# Altium PCB slave.PcbDoc (part 2 of 8)
Units mm, origin at the board's own origin, x right, y up, seen from the top; angles counter-clockwise.
Board outline 160 x 100 mm, 6 copper layers (Top, FUSED_VBAT-, Signals1, Signals2, SUPPLY, Bottom), stack 1.67 mm thick; 582 components, 375 nets, 1615 pads, 3043 vias.
Unrouted connection lines stored in the file: 1.
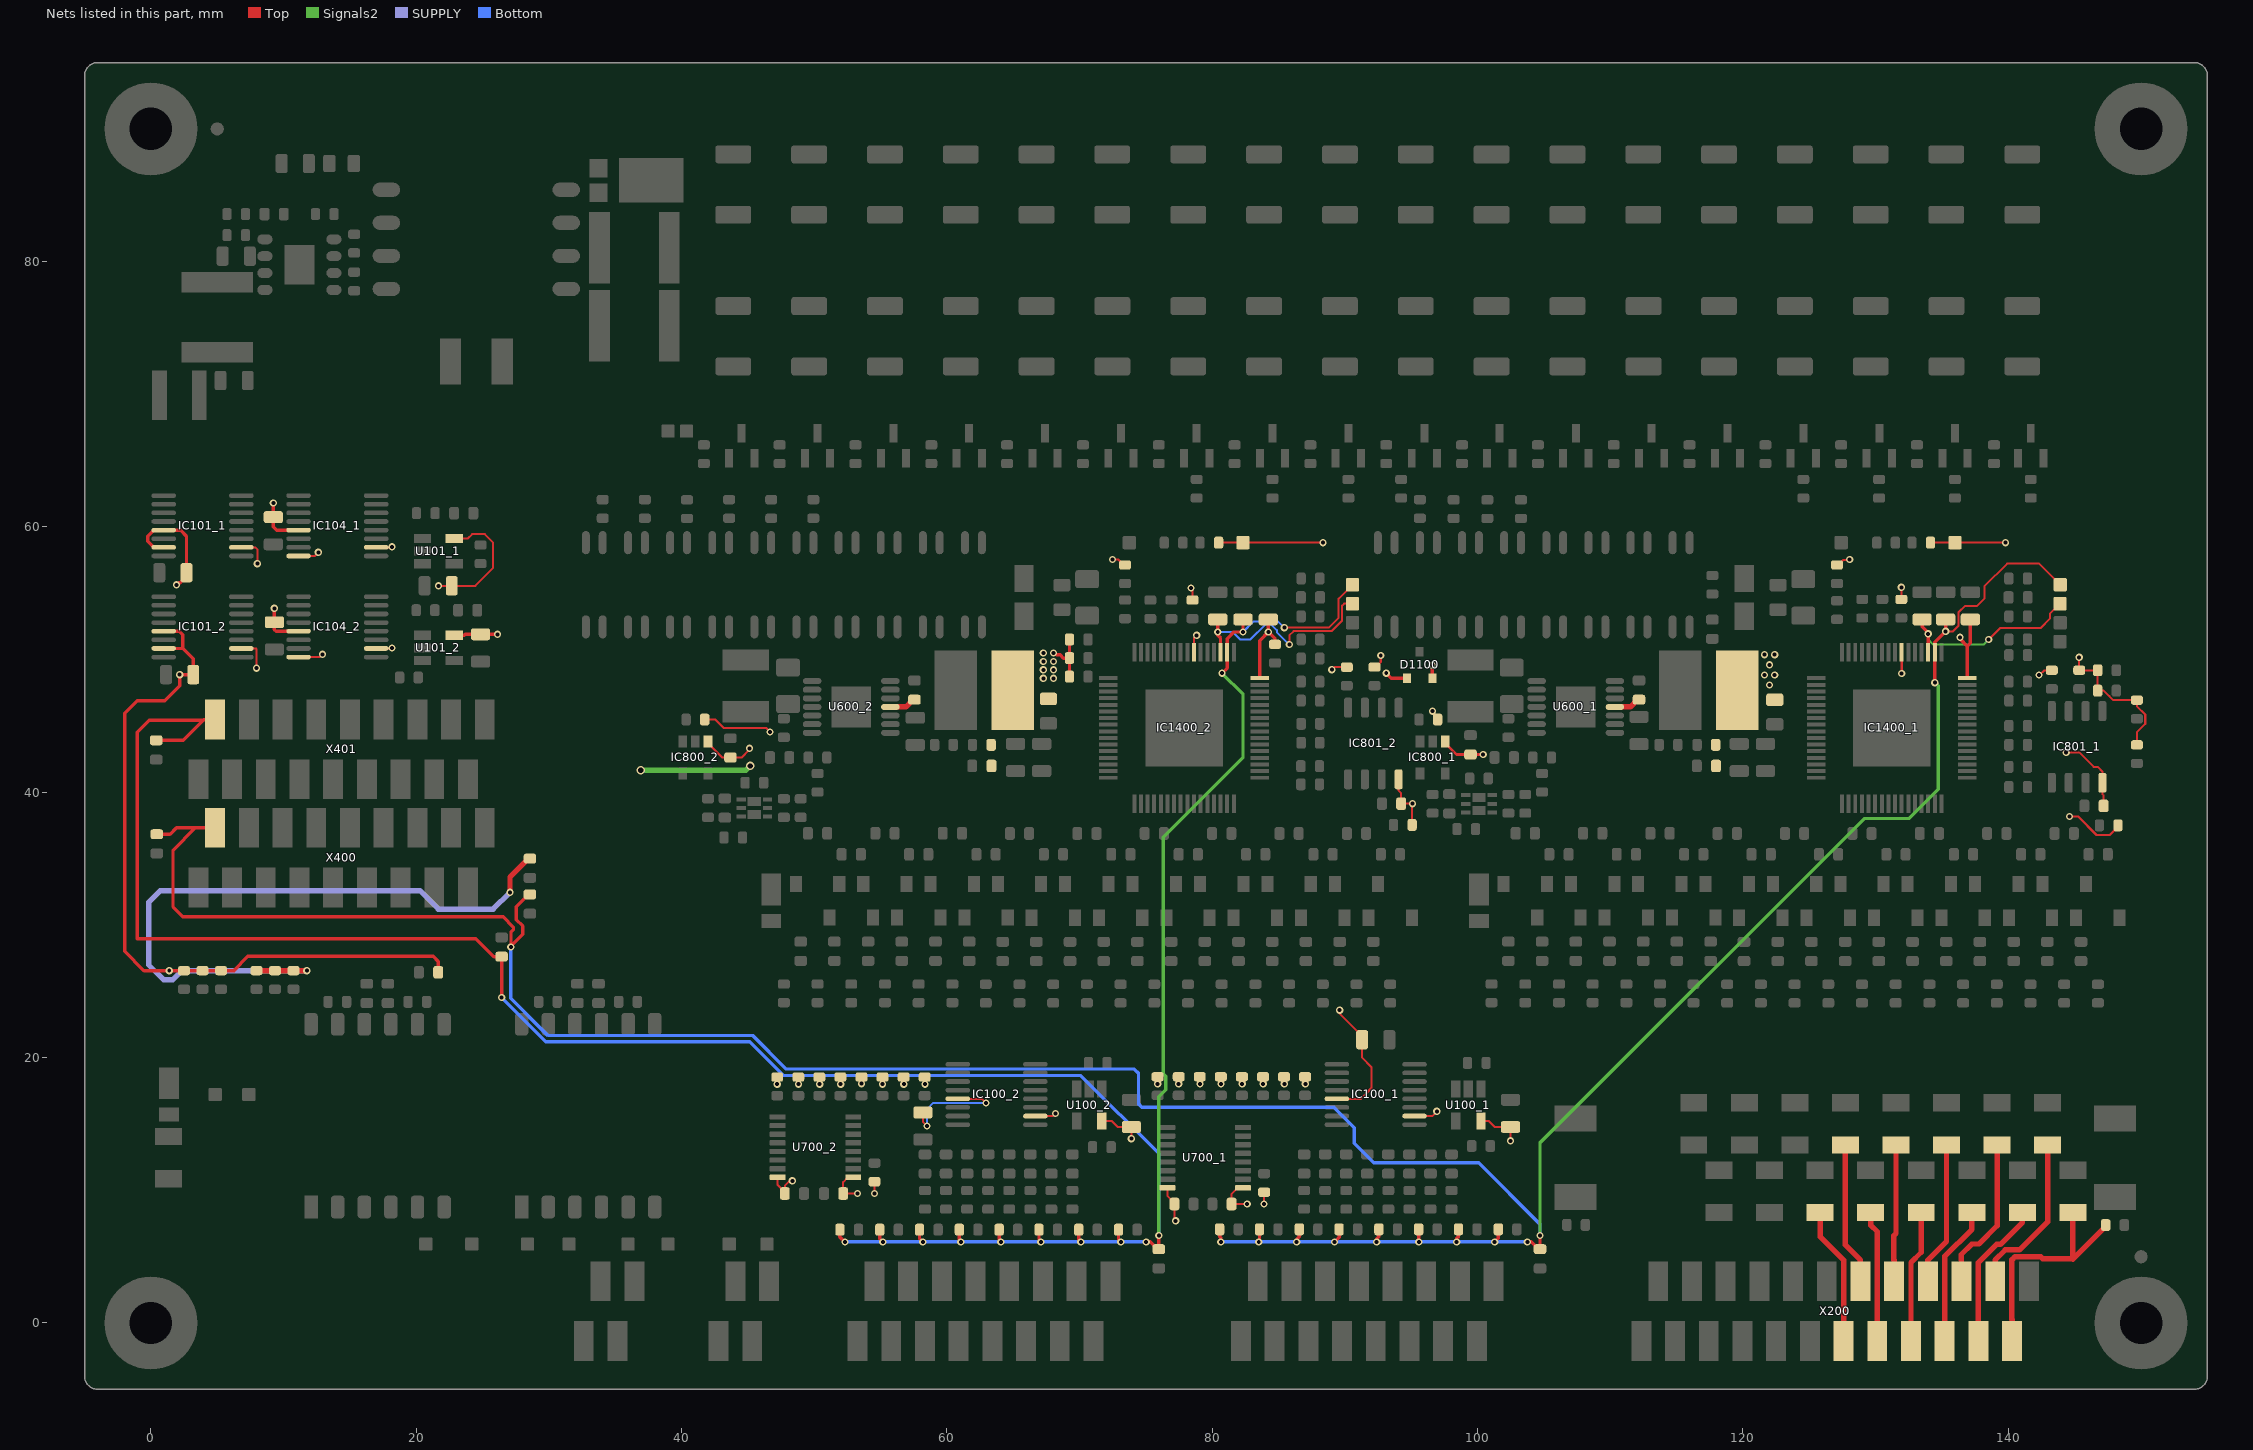
[diagram p6: the nets of this part, all layers, seen from the top]

## Components (designator, comment, footprint, x,y, rotation, side; value= is the part's Value field where it differs from the comment) (continued)
Z1315_1 "MMSZ4692T1G" ONSC-SOD-123-2-425-04_V 111.211,30.552 r0 top locked (schematic designator Z1315)
Z1315_2 "MMSZ4692T1G" ONSC-SOD-123-2-425-04_V 57.871,30.552 r0 top locked (schematic designator Z1315)
Z1316_1 "MMSZ4692T1G" ONSC-SOD-123-2-425-04_V 113.731,33.092 r0 top locked (schematic designator Z1316)
Z1316_2 "MMSZ4692T1G" ONSC-SOD-123-2-425-04_V 60.411,33.092 r0 top locked (schematic designator Z1316)
Z1317_1 "MMSZ4692T1G" ONSC-SOD-123-2-425-04_V 116.291,30.552 r0 top locked (schematic designator Z1317)
Z1317_2 "MMSZ4692T1G" ONSC-SOD-123-2-425-04_V 62.951,30.552 r0 top locked (schematic designator Z1317)

## Footprints (in the part's own frame and the unit in brackets; to place one, negate y for a bottom-side part, rotate by r counter-clockwise, add the part's x,y. Pads: shape width x height; smd on the part's side, far side on the other; paste and mask are expansions set on the pad)
690357280476 [mm] "MiniModule Connectors, PCB Type, Male, SMT, Vertical, 4p"
  rect 1.5x3 smd: 1(1.905,2.25) 2(0.635,-2.25) 3(-0.635,2.25) 4(-1.905,-2.25)
  silkscreen extent -3.7,-2.6 3.7,2.6, body extent -4.05,-3.25 4.06,3.25, height 5.16
690357281676 [mm] "MiniModule Connectors, PCB Type, Male, SMT, Vertical, 16p"
  rect 1.5x3 smd: 1(9.525,2.25) 2(8.255,-2.25) 3(6.985,2.25) 4(5.715,-2.25) 5(4.445,2.25) 6(3.175,-2.25) 7(1.905,2.25) 8(0.635,-2.25) 9(-0.635,2.25) 10(-1.905,-2.25) 11(-3.175,2.25) 12(-4.445,-2.25) 13(-5.715,2.25) 14(-6.985,-2.25) 15(-8.255,2.25) 16(-9.525,-2.25)
  silkscreen extent -11.32,-2.6 11.32,2.6, body extent -11.67,-3.25 11.68,3.25, height 5.16
690357281876 [mm] "MiniModule Connectors, PCB Type, Male, SMT, Vertical, 18p"
  rect 1.5x3 smd: 1(10.795,2.25) 2(9.525,-2.25) 3(8.255,2.25) 4(6.985,-2.25) 5(5.715,2.25) 6(4.445,-2.25) 7(3.175,2.25) 8(1.905,-2.25) 9(0.635,2.25) 10(-0.635,-2.25) 11(-1.905,2.25) 12(-3.175,-2.25) 13(-4.445,2.25) 14(-5.715,-2.25) 15(-6.985,2.25) 16(-8.255,-2.25) 17(-9.525,2.25) 18(-10.795,-2.25)
  silkscreen extent -12.59,-2.6 12.59,2.6, body extent -12.94,-3.25 12.95,3.25, height 5.16
690357282476 [mm] "MiniModule Connectors, PCB Type, Male, SMT, Vertical, 24p"
  rect 1.5x3 smd: 1(14.605,2.25) 2(13.335,-2.25) 3(12.065,2.25) 4(10.795,-2.25) 5(9.525,2.25) 6(8.255,-2.25) 7(6.985,2.25) 8(5.715,-2.25) 9(4.445,2.25) 10(3.175,-2.25) 11(1.905,2.25) 12(0.635,-2.25) 13(-0.635,2.25) 14(-1.905,-2.25) 15(-3.175,2.25) 16(-4.445,-2.25) 17(-5.715,2.25) 18(-6.985,-2.25) 19(-8.255,2.25) 20(-9.525,-2.25) 21(-10.795,2.25) 22(-12.065,-2.25) 23(-13.335,2.25) 24(-14.605,-2.25)
  silkscreen extent -16.4,-2.6 16.4,2.6, body extent -16.75,-3.25 16.76,3.25, height 5.16
ADI-RJ-5_M [mm] "SOT-23, 5-Leads, Body 2.9x1.6mm, Pitch 0.95mm, IPC Low Density"
  rect 1.3x0.7 smd: 1(-1.2,0.95) 2(-1.2,0) 3(-1.2,-0.95) 4(1.2,-0.95) 5(1.2,0.95)
  silkscreen extent -1.32,-1.5 0.15,1.98, body extent -0.85,-1.5 0.85,1.5, height 1.45
ADI-RU-16_M [mm] "SOP, 16-Leads, Body 5x4.4mm, Pitch 0.65mm, IPC Low Density"
  oval 1.85x0.35 smd: 1(-2.925,2.275) 2(-2.925,1.625) 3(-2.925,0.975) 4(-2.925,0.325) 5(-2.925,-0.325) 6(-2.925,-0.975) 7(-2.925,-1.625) 8(-2.925,-2.275) 9(2.925,-2.275) 10(2.925,-1.625) 11(2.925,-0.975) 12(2.925,-0.325) 13(2.925,0.325) 14(2.925,0.975) 15(2.925,1.625) 16(2.925,2.275)
  silkscreen extent -3.05,-2.55 1.6,3.12, body extent -2.25,-2.55 2.25,2.55, height 1.2
CAPC1608X08N [mm] "Chip Capacitor, 2-Leads, Body 1,60x0,80mm, IPC Medium Density"
  rrect50% 0.75x0.95 smd: 1(-0.725,0) 2(0.725,0)
  body extent -0.85,-0.45 0.85,0.45, height 0.8
CAPC2012X14N [mm] "Chip Capacitor, 2-Leads, Body 2,00x1,25mm, IPC Medium Density"
  rrect40% 0.9x1.45 smd: 1(-1.025,0) 2(1.025,0)
  silkscreen extent -0.2,-0.63 0.2,0.63, body extent -1.1,-0.72 1.1,0.72, height 1.45
CAPC2220(5750)230_N [mm] "Chip Capacitor, Body 5.7x5.0mm, Height 2.3mm, IPC Medium Density"
  rect 1.55x5.4 smd: 1(-2.625,0) 2(2.625,0)
  silkscreen extent -1.45,-2.6 1.45,2.6, body extent -3.05,-2.7 3.05,2.7, height 2.3
CAPC3216X18N [mm] "Chip Capacitor, 2-Leads, Body 3,20x1,60mm, IPC Medium Density"
  rrect30% 1.35x1.8 smd: 1(-1.375,0) 2(1.375,0)
  silkscreen extent -0.3,-0.8 0.3,0.8, body extent -1.7,-0.9 1.7,0.9, height 1.8
CAPC4532X16N [mm] "Chip Capacitor, 2-Leads, Body 4,50x3,20mm, IPC Medium Density"
  rect 1.6x3.5 smd: 1(-1.95,0) 2(1.95,0)
  silkscreen extent -0.75,-1.65 0.75,1.65, body extent -2.4,-1.75 2.4,1.75, height 1.55
DIOD-POWERDI123-2_V [mm] "SOD, 2-Leads, Body 2.8x1.78mm"
  rect 1.05x1.5 smd: 1(-1.525,0)
  rect 2.4x1.5 smd: 2(0.85,0)
  silkscreen extent 2.55,-0.89 2.55,0.89, body extent -1.4,-0.89 1.4,0.89, height 1.01
Fiducial_2 [mm] "Fiducial Round 1mm"
  round 1 smd paste-0.5 mask+0.5: 0(0,0)
  Top keep-out circle w0.2: c0,0 r0.9
HM2102NL [mil]
  rect 67.5x40 smd: 1(-271.65,196.85)
  rrect50% 67.5x40 smd: 2(-271.65,117.85) 3(-271.65,38.85) 4(-271.65,-40.15) 5(-271.65,-119.15) 6(-271.65,-198.15) 7(270.85,-198.15) 8(270.85,-119.15) 9(270.85,-40.15) 10(270.85,38.85) 11(270.85,117.85) 12(270.85,196.85)
  silkscreen extent -224,-300 224,300, body extent -224,-299 224,299, height 197
Hole_3.2_Iso [mm]
  round 7 hole 3.2: Hole_3.2(0,0)
LEDC1608X07N [mm] "LED, 2-Leads, Body 1,60x0,80mm, IPC Medium Density"
  rrect50% 0.7x0.9 smd: 1(-0.7,0) 2(0.7,0)
  silkscreen extent -1.35,0.35 -1.25,0.45, body extent -0.8,-0.4 0.8,0.4, height 0.7
LITTLEFUSE_448 [mm] "Littlefuse 448 Series, 2-Leads, Body 6,10x2,69mm, IPC Medium Density"
  rect 1.96x3.15 smd: 1(-2.95,0) 2(2.95,0)
  silkscreen extent -1.1,-1.47 1.1,1.48, body extent -3.15,-1.47 3.15,1.47, height 2.94
LITTLEFUSE_466 [mm] "Littlefuse 466 Series, 2-Leads, Body 3,18x1,52mm"
  rect 1.3x2.03 smd: 1(-1.59,0) 2(1.59,0)
  silkscreen extent -0.55,-0.92 0.55,0.91, body extent -1.65,-0.82 1.65,0.82, height 0.66
LT-S8E-8_V [mm] "SOIC, 8-Leads, Body 4.9x3.9mm, Pitch 1.27mm, Thermal Pad 3.25x2.26mm, Recommended"
  oval 1.143x0.76 smd: 1(-2.602,1.905) 2(-2.602,0.635) 3(-2.602,-0.635) 4(-2.602,-1.905) 5(2.601,-1.905) 6(2.601,-0.635) 7(2.601,0.635) 8(2.601,1.905)
  rect 2.26x2.99 smd: 9(0,0)
  silkscreen extent -2.73,-2.5 1.62,2.96, body extent -3.01,-2.45 3.01,2.45, height 1.75
NXP-SOT23-3_V [mm] "SOT23, 3-Leads, Body 1.3x2.9mm, Pitch 0.95mm"
  rect 0.6x0.7 smd paste-0.05: 1(0.95,1) 2(-0.95,1) 3(0,-1)
  silkscreen extent -1.45,-0.65 1.45,1.79, body extent -1.45,-0.65 1.45,0.65, height 1.1
NXP-SOT23_N [mm] "SOT23, 3-Leads, Body 3x1.4mm, Pitch 0.95mm, IPC Medium Density"
  rect 1.4x0.6 smd: 1(-0.95,0.95) 2(-0.95,-0.95) 3(0.95,0)
  silkscreen extent -1.07,-1.5 0.7,1.92, body extent -0.7,-1.5 0.7,1.5, height 1.1
ONSC-SOD-123-2-425-04_V [mm] "SOD, 2-Leads, Body 2.69x1.6mm"
  rect 0.91x1.22 smd: 1(-1.635,0) 2(1.635,0)
  silkscreen extent -1.76,-0.8 0.78,1.28, body extent -1.35,-0.8 1.35,0.8, height 1.35
PBSS4112PANP [mm]
  rect 0.7x0.3 smd: 1(-0.995,0.65) 2(-0.995,0) 3(-0.995,-0.65) 4(0.995,-0.65) 5(0.995,0) 6(0.995,0.65)
  rect 1x0.67 smd: 7(0,0.49) 8(0,-0.49)
  silkscreen extent -1.5,-1.2 1.05,1.25, body extent -1.05,-1.05 1.05,1.05, height 0.65
PowerDI5 [mm] "PowerDI5, 3-Leads, Body 3,97x6,50mm"
  rect 4.86x3.36 smd: 1(1.126,0)
  rect 1.39x1.4 smd: 2(-2.856,0.92) 3(-2.856,-0.92)
  silkscreen extent -1.88,-2.05 3.63,2.32, body extent -3.25,-2.02 3.25,2.02, height 1.15
PW0016A_L [mm] "SOP, 16-Leads, Body 5.1x4.5mm, Pitch 0.65mm, IPC High Density"
  rrect25% 1.2x0.4 smd: 1(-2.85,2.275) 2(-2.85,1.625) 3(-2.85,0.975) 4(-2.85,0.325) 5(-2.85,-0.325) 6(-2.85,-0.975) 7(-2.85,-1.625) 8(-2.85,-2.275) 9(2.85,-2.275) 10(2.85,-1.625) 11(2.85,-0.975) 12(2.85,-0.325) 13(2.85,0.325) 14(2.85,0.975) 15(2.85,1.625) 16(2.85,2.275)
  silkscreen extent -2.98,-2.55 1.85,3.15, body extent -3.21,-2.5 3.21,2.5, height 1
PWP0014A [mm] "TI PWP0014A Package"
  oval 1.4x0.45 smd: 1(-2.95,1.95) 2(-2.95,1.3) 3(-2.95,0.65) 4(-2.95,0) 5(-2.95,-0.65) 6(-2.95,-1.3) 7(-2.95,-1.95) 8(2.95,-1.95) 9(2.95,-1.3) 10(2.95,-0.65) 11(2.95,0) 12(2.95,0.65) 13(2.95,1.3) 14(2.95,1.95)
  rect 3x3.1 smd: 15(0,0)
  silkscreen extent -3.07,-2.55 1.85,2.85, body extent -3.2,-2.55 3.2,2.55, height 1.2
RESC1608X05N [mm] "Chip Resistor, 2-Leads, Body 1,60x0,80mm, IPC Medium Density"
  rrect50% 0.7x0.9 smd: 1(-0.7,0) 2(0.7,0)
  body extent -0.85,-0.45 0.85,0.45, height 0.45
RESC2012X05N [mm] "Chip Resistor, 2-Leads, Body 2,00x1,20mm, IPC Medium Density"
  rrect40% 0.95x1.3 smd: 1(-0.925,0) 2(0.925,0)
  silkscreen extent -0.05,-0.55 0.05,0.55, body extent -1.05,-0.65 1.05,0.65, height 0.5
RESC5025X07N [mm] "Chip Resistor, 2-Leads, Body 5,00x2,50mm, IPC Medium Density"
  rrect30% 1.35x2.7 smd: 1(-2.275,0) 2(2.275,0)
  silkscreen extent -1.2,-1.25 1.2,1.25, body extent -2.6,-1.35 2.6,1.35, height 0.7
SOIC127P600X175-8N [mm] "SOIC, 8-Leads, Body 4,90x3,90mm, Pitch 1,27mm, IPC Medium Density"
  rrect50% 1.5x0.6 smd: 1(-2.7,1.905) 2(-2.7,0.635) 3(-2.7,-0.635) 4(-2.7,-1.905) 5(2.7,-1.905) 6(2.7,-0.635) 7(2.7,0.635) 8(2.7,1.905)
  silkscreen extent -2.8,-2.45 1.55,2.8, body extent -3,-2.45 3,2.45, height 1.75
SOIC127P700X220-4N [mm] "SOIC, 4-Leads, Body 2,60x4,40mm, Pitch 1,27mm, IPC Medium Density"
  oval 1.75x0.6 smd: 1(-3.175,0.635) 2(-3.175,-0.635) 3(3.175,-0.635) 4(3.175,0.635)
  silkscreen extent -3.3,-1.45 1.9,1.61, body extent -3.5,-1.45 3.5,1.45, height 2.2
SOT-23-OT5_L [mm] "SOT23, 5-Leads, Body 2.9x1.7mm, Pitch 0.95mm, Lead Span 2.8mm, IPC High Density"
  rect 0.9x0.65 smd: 1(-1.2,0.95) 2(-1.2,0) 3(-1.2,-0.95) 4(1.2,-0.95) 5(1.2,0.95)
  silkscreen extent -1.32,-1.55 0.35,1.95, body extent -0.9,-1.55 0.9,1.55, height 1.45
Testpoint_S1 [mm] "Testpunkt, quardratisch 1mm"
  rrect20% 1x1 smd paste-0.5: 1(0,0)
TSQFP50P1200X1200X160_HS-65N [mm] "TSQFP, 64-Leads, Body 10,00x10,00mm, Pitch 0,50mm, Thermal Pad 5,84x5,84mm, IPC Medium Density"
  rect 1.4x0.3 smd: 1(-5.7,3.75) 2(-5.7,3.25) 3(-5.7,2.75) 4(-5.7,2.25) 5(-5.7,1.75) 6(-5.7,1.25) 7(-5.7,0.75) 8(-5.7,0.25) 9(-5.7,-0.25) 10(-5.7,-0.75) 11(-5.7,-1.25) 12(-5.7,-1.75) 13(-5.7,-2.25) 14(-5.7,-2.75) 15(-5.7,-3.25) 16(-5.7,-3.75) 33(5.7,-3.75) 34(5.7,-3.25) 35(5.7,-2.75) 36(5.7,-2.25) 37(5.7,-1.75) 38(5.7,-1.25) 39(5.7,-0.75) 40(5.7,-0.25) 41(5.7,0.25) 42(5.7,0.75) 43(5.7,1.25) 44(5.7,1.75) 45(5.7,2.25) 46(5.7,2.75) 47(5.7,3.25) 48(5.7,3.75)
  rect 0.3x1.4 smd: 17(-3.75,-5.7) 18(-3.25,-5.7) 19(-2.75,-5.7) 20(-2.25,-5.7) 21(-1.75,-5.7) 22(-1.25,-5.7) 23(-0.75,-5.7) 24(-0.25,-5.7) 25(0.25,-5.7) 26(0.75,-5.7) 27(1.25,-5.7) 28(1.75,-5.7) 29(2.25,-5.7) 30(2.75,-5.7) 31(3.25,-5.7) 32(3.75,-5.7) 49(3.75,5.7) 50(3.25,5.7) 51(2.75,5.7) 52(2.25,5.7) 53(1.75,5.7) 54(1.25,5.7) 55(0.75,5.7) 56(0.25,5.7) 57(-0.25,5.7) 58(-0.75,5.7) 59(-1.25,5.7) 60(-1.75,5.7) 61(-2.25,5.7) 62(-2.75,5.7) 63(-3.25,5.7) 64(-3.75,5.7)
  rect 5.84x5.84 smd: 65(0,0)
  silkscreen extent -5.82,-4.6 4.6,4.6, body extent -6,-6 6,6, height 1.6
TYS6045221M-10 [mm] "Precision Wire Wound Inductor, 2-Leads, Body 6,00x6,00mm, IPC Medium Density"
  rect 3.2x6 smd: 1(-2.15,0) 2(2.15,0)
  silkscreen extent -4.05,-3.15 0.15,3.15, body extent -3.1,-3 3.1,3, height 4.8
VISH-DO-214AC-2_L [mm] "DO-214AC, 2-Leads, Body 4.5x2.79mm, IPC High Density"
  rect 2.05x1.45 smd: 1(-1.425,0) 2(1.425,0)
  silkscreen extent -3.12,-1.4 2.25,1.4, body extent -2.25,-1.4 2.25,1.4, height 2.29
"WE-LQS 4018" [mm] "SMD Power Inductor, 2-Leads, Body 4.0x4.0mm"
  rect 1.1x3.7 smd: 1(-1.5,0) 2(1.5,0)
  body extent -2,-2 2,2, height 1.78
WE_750313457 [mm] "Würth Elektronik 750313457"
  oval 2.08x1.07 smd: 1(-6.78,-3.735) 2(-6.78,-1.245) 3(-6.78,1.245) 4(-6.78,3.735) 5(6.78,3.735) 6(6.78,1.245) 7(6.78,-1.245) 8(6.78,-3.735)
  silkscreen extent -6.98,-6.65 5.43,6.65, body extent -7.62,-6.65 7.62,6.65, height 11.44

## Part data
C100_1 C100_2 C400 C401 C404 C405 C406 C407 C602_1 C602_2 C604_1 C604_2 C607_1 C607_2 C700_1 C700_2 C701_1 C701_2 C800_1 C800_2 C801_1 C801_2 C903 C1100: library part gen_C_ceramic_100n_50V_X7R_0603, "MLCC", Capacitance=100n, Case EIA=0603, Case Metric=1608, Dielectric=X7R, PnP Package=C_0603_10, PnP Value=100n/50V/X7R, Rated Voltage=50V, Supplier Part Number 1=2525267, Automotive Qualified=True, Part Number=gen_C_ceramic_100n_50V_X7R_0603, PnP equipped=x, Supplier 1=Farnell, Supplier 2=Digikey, Supplier 3=Farnell, Supplier Part Number 2=490-6049-1-ND, Supplier Part Number 3=2070398
C101_1 C101_2 C102_1 C102_2 C103_1 C103_2 C104_1 C104_2 C105_1 C105_2 C603_1 C603_2 C900 C904 C1401_1 C1401_2 C1402_1 C1402_2 C1403_1 C1403_2: library part gen_C_ceramic_1u_50V_X7R_0805, "MLCC", Capacitance=1u, Case EIA=0805, Case Metric=2012, Dielectric=X7R, Operating Temperature="-55°C - +125°C", Rated Voltage=50V, Supplier Part Number 1=2672199, Tolerance="± 10%", Automotive Qualified=True, AVT Set=x, Part Number=gen_C_ceramic_1u_50V_X7R_0805, Supplier 1=Farnell, Supplier 2=Farnell, Supplier 3=Farnell, Supplier Part Number 2=2479894, Supplier Part Number 3=2464630
C106_1 C106_2 C107_1 C107_2 C108_1 C108_2 C109_1 C109_2 C110_1 C110_2 C111_1 C111_2 C112_1 C112_2 C113_1 C113_2 C114_1 C114_2 C115_1 C115_2 C608_1 C608_2 C1300_1 C1300_2 C1301_1 C1301_2 C1302_1 C1302_2 C1303_1 C1303_2 C1304_1 C1304_2 C1305_1 C1305_2 C1306_1 C1306_2 C1307_1 C1307_2 C1308_1 C1308_2 C1309_1 C1309_2 C1310_1 C1310_2 C1311_1 C1311_2 C1312_1 C1312_2 C1313_1 C1313_2 C1314_1 C1314_2 C1315_1 C1315_2 C1316_1 C1316_2 C1317_1 C1317_2 C1318_1 C1318_2 C1319_1 C1319_2 C1320_1 C1320_2 C1321_1 C1321_2 C1322_1 C1322_2 C1323_1 C1323_2 C1324_1 C1324_2 C1325_1 C1325_2 C1326_1 C1326_2 C1327_1 C1327_2 C1328_1 C1328_2 C1329_1 C1329_2 C1330_1 C1330_2 C1331_1 C1331_2 C1332_1 C1332_2 C1333_1 C1333_2 C1334_1 C1334_2 C1335_1 C1335_2: library part gen_C_ceramic_10n_100V_X7R_0603, "MLCC", Capacitance=10n, Case EIA=0603, Case Metric=1608, Dielectric=X7R, Rated Voltage=100V, Supplier Part Number 1=1301715, Automotive Qualified=True, Part Number=gen_C_ceramic_10n_100V_X7R_0603, Supplier 1=Farnell, Supplier 2=Farnell, Supplier 3=Farnell, Supplier Part Number 2=2821192, Supplier Part Number 3=2210878
C600_1 C600_2: library part gen_C_ceramic_1u_250V_X7R_1812, "MLCC", Capacitance=1u, Case EIA=1812, Case Metric=4532, Dielectric=X7T, Rated Voltage=250V, Supplier Part Number 1=2435499, Automotive Qualified=True, Part Number=gen_C_ceramic_1u_250V_X7R_1812, Supplier 1=Farnell
C601_1 C601_2 C1400_1 C1400_2: library part gen_C_ceramic_100n_200V_X7R_1206, "MLCC", Capacitance=100n, Case EIA=1206, Case Metric=3216, Dielectric=X7R, Rated Voltage=200V, Supplier Part Number 1=2673161, Automotive Qualified=True, Part Number=gen_C_ceramic_100n_200V_X7R_1206, Supplier 1=Farnell, Supplier 2=Farnell, Supplier Part Number 2=2520773
C605_1 C605_2 C606_1 C606_2: library part gen_C_ceramic_2u2_10V_X7R_0805, "MLCC", Capacitance=2u2, Case EIA=0805, Case Metric=2012, Dielectric=X7R, Rated Voltage=10V, Supplier Part Number 1=2478259, Automotive Qualified=True, Part Number=gen_C_ceramic_2u2_10V_X7R_0805, Supplier 1=Farnell, Supplier 2=Farnell, Supplier Part Number 2=2070513
C902: library part gen_C_ceramic_22u_50V_X7R_2220_stacked, "MLCC", Capacitance=22u, Case EIA=2220, Case Metric=5750, Dielectric=X7R, Rated Voltage=50V, Supplier Part Number 1=399-5797-1-ND, Automotive Qualified=True, Part Number=gen_C_ceramic_22u_50V_X7R_2220_stacked, Supplier 1=Digikey
C905: library part gen_C_ceramic_470p_100V_X7R_0805, "MLCC", Capacitance=470p, Case EIA=0805, Case Metric=2012, Dielectric=X7R, Rated Voltage=100V, Supplier Part Number 1=2070482, Automotive Qualified=True, Part Number=gen_C_ceramic_470p_100V_X7R_0805, Supplier 1=Farnell
C906: library part gen_C_ceramic_4n7_1000V_X7R_1812, "MLCC", Capacitance=4n7, Case EIA=1812, Case Metric=4532, Dielectric=X7R, Rated Voltage=1000V, Supplier Part Number 1=2834565, Automotive Qualified=True, Part Number=gen_C_ceramic_4n7_1000V_X7R_1812, Supplier 1=Farnell
C907 C908: library part gen_C_ceramic_2u2_250V_X7R_2220, "MLCC", Capacitance=2u2, Case EIA=2220, Case Metric=5750, Dielectric=X7R, Rated Voltage=250V, Supplier Part Number 1=445-7997-2-ND, Automotive Qualified=True, Part Number=gen_C_ceramic_2u2_250V_X7R_2220, Supplier 1=Digikey
C1404_1 C1404_2 C1405_1 C1405_2: library part gen_C_ceramic_100p_50V_C0G_0603, "MLCC", Capacitance=100p, Case EIA=0603, Case Metric=1608, Dielectric=C0G, Rated Voltage=50V, Supplier Part Number 1=2478236, Tolerance="± 10%", Automotive Qualified=True, Part Number=gen_C_ceramic_100p_50V_C0G_0603, Supplier 1=Farnell
D900 D1400_1 D1400_2: library part CMP-2000-05099-1, "1 A High Voltage Schottky Barrier Rectifier, 0.62 V, -55 to 175 degC, 2- Pin POWERDI123, Pb-Free, Tape and Reel", Average Rectified Current-Max=1A, Forward Voltage=0.77V, Manufacturer="Diodes Inc", Peak Current-Max=40A, Reverse Current-Max=1µA, Reverse Voltage-Max [Vrrm]=100V, Datasheet URL=https://datasheet.ciiva.com/15144/getdatasheetpartid-44146-15144126.pdf, Datasheet Version=Sep-14, Manufacturer URL=http://www.diodes.com/
D901: library part PDS3200-13, "Schottky Diode 3A 200V 780mV", Breakdown Voltage=200V, Continuous Forward Current=3A, Manufacturer="DIODES Inc", Operating Temperature="-65°C - +150°C", Supplier Part Number 1=1713904, Automotive Qualified=True, ComponentLink1Description=Datasheet, ComponentLink1URL=http://www.farnell.com/datasheets/2238298.pdf, Part Name=PDS3200, Part Number=PDS3200-13, Supplier 1=Farnell
D1100: library part CMP-2000-04915-1, "Schottky Barrier Diode, 30 V, 3-Pin SOT23, RoHS, Tape and Reel", Current Ifsm=600mA, Diode Case Style=SOT-23, Forward Current If(AV)=200mA, Forward Voltage=800mV, Junction Temperature Tj Max=125degC, Manufacturer="NXP Semiconductors", Operating Temperature Max=150degC, Operating Temperature Min=-65degC, Operating Temperature Range=-65degCto+150degC, Package Description="3-Pin Small Outline Transistor, Body 1.3 x 2.9 mm, Pitch 0.95 mm", Package Reference=SOT23-3, Package Version=Feb-16, Repetitive Reverse Voltage Vrrm Max=30V, Common Connection=Cathode, Datasheet URL=https://datasheet.ciiva.com/33723/1668625-33723936.pdf, Datasheet Version="Rev. 5 , 10/2012", Diode Type=Schottky, Forward Surge Current Ifsm Max=600mA, Forward Voltage VF Max=800mV, Manufacturer URL=http://www.nxp.com/, No. of Pins=3, Package / Case=SOT-23, Package URL=http://www.nxp.com/documents/outline_drawing/SOT23.pdf, Pin Configuration=1A1,2A2,3comK, Reel Quantity=3000, Reverse Recovery Time trr Max=5ns, Reverse Recovery Time trr Typ=5ns, SMD Marking=L43/*W1, SVHC=NoSVHC(19-Dec-2012), Tape Width=8mm, Termination Type=SMD
D1401_1 D1401_2: library part CMP-0548-00243-2, "Transient Voltage Suppressor, 6.40 to 231 V, 85 V Stand-off Voltage, Uni-Directional, -55 to 155 degC, 2-pin DO-214AC, Pb-Free, Tape and Reel", Manufacturer="Vishay Semiconductor", Operating Junction and Storage Temperature Range="-55 to 150 degC", ComponentLink1Description="Manufacturer URL", ComponentLink1URL=http://www.vishay.com/, ComponentLink2Description=Datasheet, ComponentLink2URL=http://www.vishay.com/docs/88390/smaj50a.pdf, ComponentLink3Description="Package Specification", ComponentLink3URL=http://www.vishay.com/docs/88390/smaj50a.pdf, DatasheetVersion=12/8/2013, ID (uA)=1, IFSM="40 A", Mounting Technology="Surface Mount", PackageDescription="2-Pin DO-214AC (SMA), Body 4.245 x 2.665 mm", PackageReference=DO-214AC-2, Packing="Tape and Reel", PartNumber=SMAJ85A-E3/61, PPPM (W)="400, 300", RoHS=TRUE, VBR Uni-Directional (V)="6.4 to 231", VWM (V)=85
F300 F320: "Fuse, Surface Mount, NANO2 Series, 500 mA, 125 VAC, 32 VDC, Very Fast Acting, SMD", Manufacturer=Littlefuse, Operating Temperature="-55°C - +125°C", Supplier Part Number 1=1596919, Automotive Qualified=False, ComponentLink1Description=Datasheet, ComponentLink1URL=http://www.farnell.com/datasheets/1792947.pdf, Part Number=fuse_0.5A_0448.500MR, Supplier 1=Farnell
F304 F305 F306 F307 F308 F309 F310 F311 F312 F313 F314 F315 F316 F317 F318 F319: "Fuse, Surface Mount, 466 Series, 250 mA, 125 VAC, 125 VDC, Very Fast Acting, 1206", Manufacturer=Littlefuse, Operating Temperature="-55°C - +90°C", Supplier Part Number 1=9921826, Automotive Qualified=False, ComponentLink1Description=Datasheet, ComponentLink1URL=http://www.farnell.com/datasheets/1796765.pdf, Part Number=fuse_0.25A_0466.250NR, Supplier 1=Farnell
F900: "Fuse, Surface Mount, 466 Series, 1.25 A, 63 VAC, 63 VDC, Very Fast Acting, 1206", Manufacturer=Littlefuse, Operating Temperature="-55°C - +90°C", Supplier Part Number 1=1596526, Automotive Qualified=False, ComponentLink1Description=Datasheet, ComponentLink1URL=http://www.farnell.com/datasheets/1796765.pdf, Part Number=fuse_1.25A_04661.25NR, Supplier 1=Farnell
IC100_1 IC100_2 IC101_1 IC101_2 IC104_1 IC104_2: library part CMP-0798-00197-1, "CMOS, Low Voltage, 2-Wire Serially Controlled, Matrix Switch, -40 to 85 degC, 16-pin SOP (RU-16), Tube", Manufacturer="Analog Devices", Bandwidth (Hz)=65M, Code_JEDEC=MO-153AB, ComponentLink1Description="Manufacturer URL", ComponentLink1URL=http://www.analog.com/en/index.html, ComponentLink2Description=Datasheet, ComponentLink2URL=http://www.analog.com/static/imported-files/data_sheets/ADG728_729.pdf, ComponentLink3Description="Package Specification", ComponentLink3URL=http:/www.analog.com/static/imported-files/packages/36244347913743854010197452789RU16.pdf, DatasheetVersion="Rev. C", Max Analog Signal Range="0 to Vdd", Mounting Technology="Surface Mount", PackageDescription="16-Pin Thin Shrink Small Outline Package, Body 5 x 4.4 mm, Pitch 0.65 mm", PackageReference=RU-16, PackageVersion=Nov-02, Packing=Tube, PartNumber=ADG728BRUZ, Ron (ohms)=2.5, Supply V Guar Performance="Single_(+3V), Single_(+5V)"
IC800_1 IC800_2: library part CMP-0192-00211-1, "2-Wire High-Accuracy Temperature Sensor, Slave Address 000, 5-Pin SOT-23, -55°C to +125°C Temperature, Tape and Reel", Code_IPC=SOT23-5, DatasheetVersion="revD, Nov-2010", PackageDescription="5-Lead Plastic Small Outline Transistor (OT) [SOT-23]", PackageReference=SOT-23-OT5, PackageVersion="revBB, Aug-2009"
IC801_1 IC801_2: "Automotive 2-Mbit serial I²C  / bus EEPROM with 1 MHz clock", Manufacturer=STMicroelectronics, Operating Temperature="-40°C - +125°C", PnP Package=SO8N, Supplier Part Number 1=497-16238-1-ND, Automotive Qualified=True, ComponentLink1Description=Datasheet, ComponentLink1URL=http://www.st.com/content/ccc/resource/technical/document/datasheet/83/f4/3e/e4/4e/49/42/c5/DM00200595.pdf/files/DM00200595.pdf/jcr:content/translations/en.DM00200595.pdf, Part Name=M24M02-DWMN3TP/K, Part Number=M24M02-DWMN3TP/K, Supplier 1=Digikey, Supplier 2=Mouser, Supplier 3=Farnell, Supplier Part Number 2=511-M24M02-DWMN3TP/K, Supplier Part Number 3=2849971
IC900: library part CMP-0492-02715-1, "Micropower No-Opto Isolated Flyback Converter, 2.8 to 42 V, -40 to 150 degC, 8-Pin SOIC (S8E), RoHS, Tube", Output Current="3.6 A", PartNumber=LT8302, Temperature Max="150 degC", Temperature Min="-40 degC", ComponentLink1Description="Manufacturer URL", ComponentLink1URL=http://www.linear.com/, ComponentLink2Description=Datasheet, ComponentLink2URL=http://cds.linear.com/docs/en/datasheet/8302fa.pdf, ComponentLink3Description="Package Specification", ComponentLink3URL=http://cds.linear.com/docs/en/packaging/05081857_A_S8E.pdf, DatasheetVersion="Rev. A", Mounting Technology="Surface Mount", Number of Outputs=1, PackageDescription="8-Pin Plastic Small Outline Integrated Circuit Package, Body 4.90 x 3.90 mm, Pitch 1.27 mm", PackageVersion="Rev. A, 10/2013", Packing=Tube, RoHS=TRUE, VIN Max="42 V", VIN Min="2.8 V"
IC1400_1 IC1400_2: "18 Cell Multicell Battery Monitor, -40 to 125 degC, Pb-Free", Manufacturer="Linear Technology", Operating Temperature="-40°C - +125°C", PartNumber=LTC6811HG-1#PBF, PnP Package=QFP-64, Supplier Part Number 1=LTC6813HLWE-1#3ZZPBF-ND, Automotive Qualified=True, Battery Chemistry="Li-Ion, Li-Polymer, NiMH", ComponentLink1Description=Datasheet, ComponentLink1URL=http://www.linear.com/docs/59387, ComponentLink2Description=Datasheet, ComponentLink2URL=http://cds.linear.com/docs/en/datasheet/680412f.pdf, ComponentLink3Description="Package Specification", ComponentLink3URL=http://cds.linear.com/docs/en/packaging/05081887_0_G48.pdf, Mounting Technology="Surface Mount", Number of Cells="> 1000 V of stacked Li-Ion cells", PackageDescription="48-Pin Plastic SSOP, Body 12.8 x 5.3 mm, Pitch 0.5 mm", PackageReference=G-48, PackageVersion="Rev. Ã˜, 01/2011", Part Name=LTC6813HLWE-1#3ZZPBF, Part Number=LTC6813HLWE-1#3ZZPBF, RoHS=TRUE, Supplier 1=Digikey, Type of Charger="Battery Stack Monitor", Vin Max(V)=60
L600_1 L600_2: library part TYS6045221M-10, "Power Inductor", Manufacturer="Laird-Signal Integrity Products", Operating Temperature="-55°C - +150°C", Rated Current=590mA, Saturation Current=700mA, Supplier Part Number 1=240-2742-1-ND, Automotive Qualified=True, ComponentLink1Description=Datasheet, ComponentLink1URL=http://assets.lairdtech.com/home/brandworld/files/TYS6045221M-10.pdf, Inductance=220µH, Part Number=TYS6045221M-10, Supplier 1=Digikey
L900: library part CMP-1354-00028-1, "WE-LQS SMD Power Inductor, L=10 µH", Inductance="10 ÂµH", Manufacturer="Wuerth Elektronik", ComponentLink1Description="Manufacturer URL", ComponentLink1URL=http://www.we-online.com, ComponentLink2Description=Datasheet, ComponentLink2URL=http://katalog.we-online.de/pbs/datasheet/74404042100.pdf, PackageReference="WE-LQS 4018", PartNumber=74404042100
LD1400_1 LD1400_2: library part LED_0603_green_AECQ, "TLMG1100-GS08", Breakdown Voltage=5V, Continuous Forward Current=20mA, Forward Voltage @ 20mA=2.1V, Manufacturer=Vishay, Operating Temperature="-40°C - 100°C", PnP Package=LED_0603, Supplier Part Number 1=2293494, Automotive Qualified=True, Color=green, ComponentLink1Description=Datasheet, ComponentLink1URL=http://www.farnell.com/datasheets/2049164.pdf, Part Number=LED_0603_green_AECQ, Supplier 1=Farnell, Supplier 2=Digikey, Supplier Part Number 2=751-1165-1-ND
Q600_1 Q600_2: "Dual NPN/PNP Transistor", Manufacturer=Nexperia, Maximum Continous Drain Current (25°C)=1A, Maximum Drain-Source Voltage=120V, Operating Temperature="-55°C - +150°C", Part Name="DUAL PNP/NPN", Automotive Qualified=True, ComponentLink1Description=Datasheet, ComponentLink1URL=https://assets.nexperia.com/documents/data-sheet/PBSS4112PANP.pdf, Part Number=PBSS4112PANP, Supplier 2=Digikey, Supplier 3=Mouser, Supplier Part Number 2=1727-1068-1-ND, Supplier Part Number 3=771-PBSS4112PANP
R100_1 R100_2 R101_1 R101_2 R102_1 R102_2 R103_1 R103_2 R104_1 R104_2 R105_1 R105_2 R106_1 R106_2 R107_1 R107_2 R601_1 R601_2 R605_1 R605_2 R607_1 R607_2 R700_1 R700_2 R701_1 R701_2 R702_1 R702_2 R703_1 R703_2 R704_1 R704_2 R705_1 R705_2 R706_1 R706_2 R707_1 R707_2 R708_1 R708_2 R800_1 R800_2 R801_1 R801_2 R905 R1118 R1421_1 R1421_2 R1422_1 R1422_2 R1423_1 R1423_2 R1424_1 R1424_2 R1425_1 R1425_2 R1426_1 R1426_2 R1427_1 R1427_2: library part gen_R_10k_0603, "SMD Resistor 10k 0603", Case EIA=0603, Case Metric=1608, Maximum Working Voltage=75V, Operating Temperature="-55°C - +155°C", PnP Package=R_0603, Power=0.1W, Supplier Part Number 1=2073349, Tolerance=1%, Automotive Qualified=True, Part Number=gen_R_10k_0603, PnP Value=10k, Resistance=10k, Series="E24, E96", Supplier 1=Farnell
R108_1 R108_2 R109_1 R109_2 R112_1 R112_2 R113_1 R113_2 R114_1 R114_2 R115_1 R115_2 R116_1 R116_2 R117_1 R117_2 R118_1 R118_2 R119_1 R119_2: library part gen_R_100R_0603, "SMD Resistor 100R 0603", Case EIA=0603, Case Metric=1608, Maximum Working Voltage=75V, Operating Temperature="-55°C - +155°C", PnP Package=R_0603, Power=0.1W, Supplier Part Number 1=P100HCT-ND, Tolerance=1%, Automotive Qualified=True, Part Number=gen_R_100R_0603, PnP Value=100R, Resistance=100R, Series="E24, E96", Supplier 1=Digikey
R110_1 R110_2 R111_1 R111_2 R609_1 R609_2 R610_1 R610_2 R1406_1 R1406_2 R1407_1 R1407_2 R1408_1 R1408_2 R1409_1 R1409_2 R1410_1 R1410_2 R1411_1 R1411_2 R1412_1 R1412_2 R1413_1 R1413_2 R1414_1 R1414_2 R1415_1 R1415_2 R1416_1 R1416_2 R1417_1 R1417_2 SJ300 SJ301: library part gen_R_0R_0603, "SMD Resistor 0R 0603", Case EIA=0603, Case Metric=1608, Maximum Working Voltage=75V, Operating Temperature="-55°C - +155°C", PnP Package=R_0603, Power=0.1W, Supplier Part Number 1=2616580, Automotive Qualified=True, Part Number=gen_R_0R_0603, PnP Value=0R, Resistance=0R, Series=Jumper, Supplier 1=Farnell
R600_1 R600_2 R606_1 R606_2: library part gen_R_124k_0603, "SMD Resistor 124k 0603", Case EIA=0603, Case Metric=1608, Maximum Working Voltage=75V, Operating Temperature="-55°C - +155°C", PnP Package=R_0603, Power=0.1W, Supplier Part Number 1=2138508, Tolerance=1%, Automotive Qualified=True, Part Number=gen_R_124k_0603, PnP Value=124k, Resistance=124k, Series=E96, Supplier 1=Farnell
R602_1 R602_2: library part gen_R_1k5_0603, "SMD Resistor 1k5 0603", Case EIA=0603, Case Metric=1608, Maximum Working Voltage=75V, Operating Temperature="-55°C - +155°C", PnP Package=R_0603, Power=0.1W, Supplier Part Number 1=2616745, Tolerance=1%, Automotive Qualified=True, Part Number=gen_R_1k5_0603, PnP Value=1k5, Resistance=1k5, Series="E24, E96", Supplier 1=Farnell
R603_1 R603_2: library part gen_R_1k_0603, "SMD Resistor 1k 0603", Case EIA=0603, Case Metric=1608, Maximum Working Voltage=75V, Operating Temperature="-55°C - +155°C", PnP Package=R_0603, Power=0.1W, Supplier Part Number 1=1652848, Tolerance=1%, Automotive Qualified=True, Part Number=gen_R_1k_0603, PnP equipped=x, PnP Value=1k, Resistance=1k, Series="E24, E96", Supplier 1=Farnell
R604_1 R604_2: library part gen_R_1R_0805, "SMD Resistor 1R 0805", Case EIA=0805, Case Metric=2012, Maximum Working Voltage=150V, Operating Temperature="-55°C - +155°C", PnP Package=R_0805, Power=0.125W, Supplier Part Number 1=2616757, Tolerance=1%, Automotive Qualified=True, Part Number=gen_R_1R_0805, PnP Value=1R, Resistance=1R, Series="E24, E96", Supplier 1=Farnell
R608_1 R608_2: library part gen_R_68k_0603, "SMD Resistor 68k 0603", Case EIA=0603, Case Metric=1608, Maximum Working Voltage=75V, Operating Temperature="-55°C - +155°C", PnP Package=R_0603, Power=0.1W, Tolerance=1%, Automotive Qualified=False, Part Number=gen_R_68k_0603, PnP Value=68k, Resistance=68k, Series=E24
R900: library part gen_R_390k_0603, "SMD Resistor 390k 0603", Case EIA=0603, Case Metric=1608, Maximum Working Voltage=75V, Operating Temperature="-55°C - +155°C", PnP Package=R_0603, Power=0.1W, Supplier Part Number 1=2303278, Tolerance=1%, Automotive Qualified=True, Part Number=gen_R_390k_0603, PnP Value=390k, Resistance=390k, Series=E24, Supplier 1=Farnell
R901: library part gen_R_86k6_0603, "SMD Resistor 86k6 0603", Case EIA=0603, Case Metric=1608, Maximum Working Voltage=75V, Operating Temperature="-55°C - +155°C", PnP Package=R_0603, Power=0.1W, Supplier Part Number 1=2059490, Tolerance=1%, Automotive Qualified=True, Part Number=gen_R_86k6_0603, PnP Value=86k6, Resistance=86k6, Series=E96, Supplier 1=Farnell
R902: library part gen_R_115k_0603, "SMD Resistor 115k 0603", Case EIA=0603, Case Metric=1608, Maximum Working Voltage=75V, Operating Temperature="-55°C - +155°C", PnP Package=R_0603, Power=0.1W, Supplier Part Number 1=2073367, Tolerance=1%, Automotive Qualified=True, Part Number=gen_R_115k_0603, PnP Value=115k, Resistance=115k, Series=E96, Supplier 1=Farnell
R903: library part gen_R_39R_0805, "SMD Resistor 39R 0805", Case EIA=0805, Case Metric=2012, Maximum Working Voltage=150V, Operating Temperature="-55°C - +155°C", PnP Package=R_0805, Power=0.125W, Supplier Part Number 1=1750736, Tolerance=1%, Automotive Qualified=True, Part Number=gen_R_39R_0805, PnP Value=39R, Resistance=39R, Series=E24, Supplier 1=Farnell
R904: library part gen_R_220k_0603, "SMD Resistor 220k 0603", Case EIA=0603, Case Metric=1608, Maximum Working Voltage=75V, Operating Temperature="-55°C - +155°C", PnP Package=R_0603, Power=0.1W, Tolerance=1%, Automotive Qualified=False, Part Number=gen_R_220k_0603, PnP Value=220k, Resistance=220k, Series=E24
R1100 R1101 R1102 R1103 R1104 R1105 R1106 R1107 R1108 R1109 R1110 R1111 R1112 R1113 R1114 R1115 R1116 R1117: library part gen_R_150R_0603, "SMD Resistor 150R 0603", Case EIA=0603, Case Metric=1608, Maximum Working Voltage=75V, Operating Temperature="-55°C - +155°C", PnP Package=R_0603, Power=0.1W, Supplier Part Number 1=2303076, Tolerance=1%, Automotive Qualified=True, Part Number=gen_R_150R_0603, PnP Value=150R, Resistance=150R, Series="E24, E96", Supplier 1=Farnell
R1300_1 R1300_2 R1301_1 R1301_2 R1302_1 R1302_2 R1303_1 R1303_2 R1304_1 R1304_2 R1305_1 R1305_2 R1306_1 R1306_2 R1307_1 R1307_2 R1308_1 R1308_2 R1309_1 R1309_2 R1310_1 R1310_2 R1311_1 R1311_2 R1312_1 R1312_2 R1313_1 R1313_2 R1314_1 R1314_2 R1315_1 R1315_2 R1316_1 R1316_2 R1317_1 R1317_2 R1318_1 R1318_2: library part gen_R_100R_0603, "SMD Resistor 100R 0603", Case EIA=0603, Case Metric=1608, Maximum Working Voltage=75V, Operating Temperature="-55°C - +155°C", PnP Package=R_0603, Power=0.1W, Supplier Part Number 1=2303059, Tolerance=1%, Automotive Qualified=True, Part Number=gen_R_100R_0603, PnP Value=100R, Resistance=100R, Series="E24, E96", Supplier 1=Farnell
R1400_1 R1400_2 R1419_1 R1419_2 R1420_1 R1420_2: library part gen_R_1k2_0603, "SMD Resistor 1k2 0603", Case EIA=0603, Case Metric=1608, Maximum Working Voltage=75V, Operating Temperature="-55°C - +155°C", PnP Package=R_0603, Power=0.1W, Supplier Part Number 1=2073370, Tolerance=1%, Automotive Qualified=True, Part Number=gen_R_1k2_0603, PnP Value=1k2, Resistance=1k2, Series=E24, Supplier 1=Farnell
R1401_1 R1401_2: library part gen_R_100R_0805, "SMD Resistor 100R 0805", Case EIA=0805, Case Metric=2012, Maximum Working Voltage=150V, Operating Temperature="-55°C - +155°C", PnP Package=R_0805, Power=0.125W, Supplier Part Number 1=1469862, Tolerance=1%, Automotive Qualified=True, Part Number=gen_R_100R_0805, PnP Value=100R, Resistance=100R, Series="E24, E96", Supplier 1=Farnell
R1402_1 R1402_2: library part gen_R_820R_0603, "SMD Resistor 820R 0603", Case EIA=0603, Case Metric=1608, Maximum Working Voltage=75V, Operating Temperature="-55°C - +155°C", PnP Package=R_0603, Power=0.1W, Supplier Part Number 1=1469841, Tolerance=1%, Automotive Qualified=True, Part Number=gen_R_820R_0603, PnP Value=820R, Resistance=820R, Series=E24, Supplier 1=Farnell
R1403_1 R1403_2: library part gen_R_270R_0603, "SMD Resistor 270R 0603", Case EIA=0603, Case Metric=1608, Maximum Working Voltage=75V, Operating Temperature="-55°C - +155°C", PnP Package=R_0603, Power=0.1W, Supplier Part Number 1=2141320, Tolerance=1%, Automotive Qualified=True, Part Number=gen_R_270R_0603, PnP Value=270R, Resistance=270R, Series=E24, Supplier 1=Farnell
R1404_1 R1404_2: library part gen_R_1M_0603, "SMD Resistor 1M 0603", Case EIA=0603, Case Metric=1608, Maximum Working Voltage=75V, Operating Temperature="-55°C - +155°C", PnP Package=R_0603, Power=0.1W, Supplier Part Number 1=1469746, Tolerance=1%, Automotive Qualified=True, Part Number=gen_R_1M_0603, PnP Value=1M, Resistance=1M, Series="E24, E96", Supplier 1=Farnell
R1405_1 R1405_2 R1418_1 R1418_2: library part gen_R_120R_0603, "SMD Resistor 120R 0603", Case EIA=0603, Case Metric=1608, Maximum Working Voltage=75V, Operating Temperature="-55°C - +155°C", PnP Package=R_0603, Power=0.1W, Supplier Part Number 1=1652832, Tolerance=1%, Automotive Qualified=True, Part Number=gen_R_120R_0603, PnP Value=120R, Resistance=120R, Series=E24, Supplier 1=Farnell
R1500 R1501 R1502 R1503 R1504 R1505 R1506 R1507 R1508 R1509 R1510 R1511 R1518 R1519 R1520 R1521 R1522 R1523 R1524 R1525 R1526 R1527 R1528 R1529 R1536 R1537 R1538 R1539 R1540 R1541 R1542 R1543 R1544 R1545 R1546 R1547: library part gen_R_130R_2010, "SMD Resistor 130R 2010", Case EIA=2010, Case Metric=5025, Maximum Working Voltage=400V, Operating Temperature="-55°C - +155°C", PnP Package=R_2010, Power=0.75W, Supplier Part Number 1=1892735, Tolerance=5%, Automotive Qualified=True, Part Number=gen_R_130R_2010, PnP Value=130R, Resistance=130R, Series="E24, E96", Supplier 1=Farnell
R1512 R1513 R1514 R1515 R1516 R1517 R1530 R1531 R1532 R1533 R1534 R1535 R1548 R1549 R1550 R1551 R1552 R1553: library part gen_R_3k3_0603, "SMD Resistor 3k3 0603", Case EIA=0603, Case Metric=1608, Maximum Working Voltage=75V, Operating Temperature="-55°C - +155°C", PnP Package=R_0603, Power=0.1W, Supplier Part Number 1=2303173, Tolerance=1%, Automotive Qualified=True, Part Number=gen_R_3k3_0603, PnP Value=3k3, Resistance=3k3, Series=E24, Supplier 1=Farnell
T1500 T1501 T1502 T1503 T1504 T1505 T1506 T1507 T1508 T1509 T1510 T1511 T1512 T1513 T1514 T1515 T1516 T1517: library part CMP-1259-00090-1, "P-Channel Trench MOSFET, -20 V, -2 A, -55 to 150 degC, 3-Pin SOT23, Tape and Reel", Manufacturer="NXP Semiconductors", Automotive Qualified=Y, Channel Type=P, Code_JEDEC=TO-236AB, ComponentLink1Description="Manufacturer URL", ComponentLink1URL=http://www.nxp.com/, ComponentLink2Description=Datasheet, ComponentLink2URL=http://www.nxp.com/documents/data_sheet/NX2301P.pdf, ComponentLink3Description="Package Specification", ComponentLink3URL=http://www.nxp.com/documents/outline_drawing/sot023_po.pdf, DatasheetVersion="Rev. 1", ID [max] (A)=-2, IDM [max] (A)=-6, Mounting Technology="Surface Mount", PackageDescription="3-Pin Small Outline Transistor Package, Body 2.9 x 1.3 mm, Pitch 0.95 mm", PackageReference=SOT23, PackageVersion="06-03-16, 03/2006", Packing="Tape & Reel", PartNumber=NX2301P,215, VDS [max] (V)=-20, VGSth [typ] (V)=-0.75
TP900 TP901 TP902 TP903 TP1400_1 TP1400_2 TP1401_1 TP1401_2 TP1402_1 TP1402_2 TP1403_1 TP1403_2 TP1404_1 TP1404_2 TP1405_1 TP1405_2 TP1406_1 TP1406_2 TP1407_1 TP1407_2 TP1408_1 TP1408_2 TP1409_1 TP1409_2: "Testpoint, square", Part Number=Testpoint_Square
TR900: "MID-FLYLT Flyback Transformers for Linear Technology", Manufacturer="Würth Elektronik", Supplier Part Number 1=1297-1136-1-ND, Automotive Qualified=False, ComponentLink1Description=Datasheet, ComponentLink1URL=http://katalog.we-online.de/ctm/datasheet/750313457.pdf, ComponentLink2Description=Website, ComponentLink2URL=http://katalog.we-online.de/en/ctm/MID-FLYLT/750313457, Part Number=WE_750313457, Supplier 1=Digikey
TR1400_1 TR1400_2: "Pulse HM2102NL BMS Transformer", Manufacturer=Pulse, Operating Temperature="-40°C - +125°C", Supplier Part Number 1=673-HM2102NL, Automotive Qualified=True, ComponentLink1Description=Datasheet, ComponentLink1URL=https://www.mouser.com/ds/2/336/HM2102NL-1218600.pdf, Part Number=HM2102NL, Supplier 1=Mouser, Supplier 2=Digikey, Supplier Part Number 2=1840-1034-1-ND
U100_1 U100_2 U101_1 U101_2: library part CMP-0384-01512-2, "Single Channel RRIO Operational Amplifier, 2.5 MHz BW, 1 V/us SR, Industrial, 5-pin SOT23 (RJ-5), Reel", Amplifiers Per Package=1, Generic Part Number=AD8628, Input Bias Current=30pA, Input Offset Voltage=1uV, Manufacturer="Analog Devices", Automotive Qualified=Yes, Code_JEDEC=MO-178-AA, ComponentLink1Description="Manufacturer URL", ComponentLink1URL=http://www.analog.com/en/index.html, ComponentLink2Description=Datasheet, ComponentLink2URL=http://www.analog.com/static/imported-files/data_sheets/AD8628_8629_8630.pdf, ComponentLink3Description="Package Specification", ComponentLink3URL=http://www.analog.com/static/imported-files/packages/PKG_PDF/SOT-23(RJ)/RJ_5.pdf, ComponentLink4Description="Reference Circuit", ComponentLink4URL=http://www.analog.com/en/all-operational-amplifiers-op-amps/operational-amplifiers-op-amps/ad8628/products/product.html#product-recommendations, DatasheetVersion="Rev. I", Iq/Amp=1.1mA, Mounting Technology="Surface Mount", PackageDescription="5-Pin Small Outline Transistor Package, Body 2.9 x 1.6 mm, Pitch 0.95 mm", PackageReference=RJ-5, PackageVersion=121608-A, PartNumber=AD8628ARTZ-R2, RevisionNote="Reference Circuit URL fixed", Slew Rate=1V/us, Small Signal Bandwidth=2.5MHz, V Span Max=6V, V Span Min=2.7V
U600_1 U600_2: "Automotive DC/DC buck converter", Manufacturer="Texas Instruments", Operating Temperature="−40°C - +125°C", PnP Package=HTSSOP-14, Supplier Part Number 1=296-47791-1-ND, Automotive Qualified=True, Part Name=LM5161QPWPRQ1, Part Number=LM5161QPWPRQ1, Supplier 1=Digikey, Supplier 2=Mouser, Supplier Part Number 2=595-LM5161QPWPRQ1
U700_1 U700_2: library part CMP-0314-00338-2, "Low-Voltage 8-Bit I2C and SMBus I/O Expander, 1.65 to 5.5 V, -40 to 85 degC, 16-pin TSSOP (PW), Green (RoHS & no Sb/Br)", 5V Tolerant I/O=Yes, Manufacturer="Texas Instruments", Max Frequency(kHz)=400, # of I/Os=8, Code_JEDEC=MO-153, ComponentLink1Description=Datasheet, ComponentLink1URL=http://www.ti.com/general/docs/lit/getliterature.tsp?genericPartNumber=TCA6408A&fileType=pdf, Configuration Registers=Yes, DatasheetVersion=SCPS192C, Eco-Plan="Green (RoHS & no Sb/Br)", fSCLK(Max)(MHz)=400, I2C Address="0100 00x", Interrupt Output=Yes, Low Power=Yes, Mounting Technology="Surface Mount", No. of Outputs=8, PackageDescription="16-Pin Plastic Thin Small Outline Package 5 x 4.4 mm Body ,0.65 mm Pitch", PackageReference=PW0016A, PackageVersion="revG, Feb-2011", PartNumber=TCA6408APWR, Push-Pull I/O Type=Yes, Reset Input=Yes, SubFamily="I2C IO Expander", VCC(Max)(V)=5.5, VCC(Min)(V)=1.65, Vcc range(V)="1.65 to 5.5"
U1100 U1101 U1102 U1103 U1104 U1105 U1106 U1107 U1108 U1109 U1110 U1111 U1112 U1113 U1114 U1115 U1116 U1117: library part ACPL-217-56BE, "Optocoupler, Transistor Output, 1 Channel", Manufacturer="Broadcom Limited", Operating Temperature="-55°C - +110°C", Supplier Part Number 1=1602623, Automotive Qualified=False, ComponentLink1Description=Datenblatt, ComponentLink1URL=http://www.farnell.com/datasheets/45634.pdf, Part Name=ACPL-217, Part Number=ACPL-217-56BE, Supplier 1=Farnell
X200: library part CMP-1502-00899-2, Contact Resistance=10mΩ, Current Rating=1.5A, Insulation Resistance=1GΩ, Max Operating Temperature=105°C, Min Operating Temperature=-40°C, Operating Supply Voltage=100V, Gender=Male, Lead Pitch=2.54mm, Length=31.31mm, NexarPartId=65759601, Number of Pins=24, Packaging="Tape and Reel", Pitch=2.54mm, RoHS=Compliant
X201 x202: library part CMP-1502-00895-2, Contact Resistance=10mΩ, Current Rating=1.5A, Insulation Resistance=1GΩ, Max Operating Temperature=105°C, Min Operating Temperature=-40°C, Operating Supply Voltage=100V, Gender=Male, Lead Pitch=2.54mm, Length=21.15mm, NexarPartId=65759598, Number of Pins=16, Packaging="Tape and Reel", Pitch=2.54mm, RoHS=Compliant
X400 X401: library part CMP-1502-00896-2, Contact Resistance=10mΩ, Current Rating=1.5A, Insulation Resistance=1GΩ, Max Operating Temperature=105°C, Min Operating Temperature=-40°C, Operating Supply Voltage=100V, Gender=Male, Lead Pitch=2.54mm, Length=23.69mm, NexarPartId=65759599, Number of Pins=18, Packaging="Tape and Reel", Pitch=2.54mm, RoHS=Compliant
X500 X501: library part CMP-1502-00889-2, Color=Red, Contact Resistance=10mΩ, Current Rating=1.5A, Insulation Resistance=1GΩ, Max Operating Temperature=105°C, Min Operating Temperature=-40°C, Operating Supply Voltage=100V, Connector Type="Male Pin", Contact Material=Bronze, Contact Plating=Tin, Fastening Type=Ramp, Gender=Male, Lead Pitch=2.54mm, Length=5.91mm, Mount="Surface Mount", NexarPartId=8917647, Number of Contacts=4, Number of Pins=4, Number of Positions=4, Number of Rows=2, Orientation=Straight, Packaging="Tape and Reel", Pitch=2.54mm, REACH SVHC=Unknown, RoHS=Compliant, Row Spacing=1.4986mm, Termination=Solder, Voltage Rating=100V
Z1300_1 Z1300_2 Z1301_1 Z1301_2 Z1302_1 Z1302_2 Z1303_1 Z1303_2 Z1304_1 Z1304_2 Z1305_1 Z1305_2 Z1306_1 Z1306_2 Z1307_1 Z1307_2 Z1308_1 Z1308_2 Z1309_1 Z1309_2 Z1310_1 Z1310_2 Z1311_1 Z1311_2 Z1312_1 Z1312_2 Z1313_1 Z1313_2 Z1314_1 Z1314_2 Z1315_1 Z1315_2 Z1316_1 Z1316_2 Z1317_1 Z1317_2: library part CMP-1060-00434-1, "Zener Voltage Regulator, 500 mW, 2-Pin SOD-123, Pb-Free, Tape and Reel", Manufacturer="On Semiconductor", ComponentLink1Description="Manufacturer URL", ComponentLink1URL=http://www.onsemi.com/, ComponentLink2Description=Datasheet, ComponentLink2URL=http://www.onsemi.com/pub_link/Collateral/MMSZ4678T1-D.PDF, ComponentLink3Description="Package Specification", ComponentLink3URL=http://www.onsemi.com/pub_link/Collateral/425-04.PDF, DatasheetVersion="Rev. 9", Mounting Technology="Surface Mount", PackageDescription="2-Pin SOD, Body 1.6 x 2.69 mm", PackageReference=SOD-123-2-425-04, PackageVersion="Rev. G, 10/2009", Packing="Tape and Reel", PartNumber=MMSZ4692T1G, P Max (W)=0.5, RoHS=Pb-Free, VZ Typ (V)=6.8

## Via types
v1: diameter 0.55, hole 0.3, Top to Bottom, tented both sides, 2963 vias
v2: diameter 0.55, hole 0.3, Top to Bottom, 41 vias
v3: diameter 0.75, hole 0.5, Top to Bottom, tented both sides, 22 vias
v4: diameter 0.65, hole 0.4, Top to Bottom, tented both sides, 16 vias
v5: diameter 0.75, hole 0.5, Top to Bottom, 1 vias

## Nets (pads, with @x,y where several pads share a name; then routed paths per layer and width w, separated by ;. In a path a pad name is that pad's centre, name@x,y a point inside that pad or via, vN(x,y) a via of type N, cw(c..) or ccw(c..) an arc to the next point about the centre after c; other vN are vias at no path point)
+3.0V_VREF1_1: C1403_1.2 IC1400_1.51 TP1401_1.1 | length 14.6
  Top w0.152: v1(138.516,51.507) 139.375,52.366 142.423,52.366 143.134,53.077 143.134,53.447 TP1401_1.1@143.893,54.206
  Top w0.254: C1403_1.2@133.499,53.022 133.499,52.471 133.963,52.006 v1(133.963,51.932) IC1400_1.51@133.963,50.59
  Signals2 w0.152: v1(133.963,51.932) 133.963,51.507 134.349,51.121 138.13,51.121 v1(138.516,51.507)
+3.0V_VREF1_2: C1403_2.2 IC1400_2.51 TP1401_2.1 | length 16.5
  Top w0.152: v1(85.811,51.126) 85.811,51.825 86.128,52.142 88.986,52.142 89.78,52.936 89.78,54.047 89.938,54.206 TP1401_2.1@90.573,54.206
  Top w0.254: C1403_2.2@80.413,53.022 v1(80.413,52.075) 80.413,51.832 80.623,51.622 IC1400_2.51@80.623,50.54
  Bottom w0.152: v1(80.413,52.075) 81.534,52.075 82.089,51.521 82.885,51.521 83.994,52.63 84.453,52.63 84.875,52.207 84.875,52.062 v1(85.811,51.126)
+3.0V_VREF2_1: C100_1.2 C401.2 C405.2 C1402_1.2 IC1400_1.50 R100_1.2 R101_1.2 R102_1.2 R103_1.2 R104_1.2 R105_1.2 R106_1.2 R107_1.2 TP1402_1.1 X400.17 | length 243.3
  Top w0.152: C100_1.2@104.602,5.56 C100_1.2@104.702,5.56 ; v1(135.277,52.122) 135.829,52.122 136.233,52.526 136.233,53.542 136.738,54.047 137.649,54.047 138.198,54.597 138.198,55.51 139.911,57.222 142.326,57.222 TP1402_1.1@143.913,55.635
  Top w0.254: C401.2@0.448,36.833 1.446,36.833 1.933,37.32 3.362,37.32 ; X400.17@4.848,37.32 3.362,37.32 ; v1(27.132,28.329) 27.142,28.339 27.142,29.44 27.33,29.628 27.33,29.838 26.558,30.611 2.408,30.611 1.673,31.346 1.673,35.632 3.362,37.32 ; v1@27.232,28.33 27.232,28.488 28.026,29.282 28.026,29.917 27.55,30.393 27.55,31.377 28.471,32.298 C405.2@28.571,32.298 ; R100_1.2@80.559,7.053 80.559,6.501 80.646,6.414 v1(80.646,6.105) ; v1(83.503,6.105) 83.559,6.161 R101_1.2@83.559,7.053 ; v1(86.361,6.105) 86.361,6.303 86.559,6.501 R102_1.2@86.559,7.053 ; v1(89.218,6.105) 89.559,6.446 R103_1.2@89.559,7.053 ; v1(92.393,6.105) 92.393,6.336 92.559,6.501 R104_1.2@92.559,7.053 ; R105_1.2@95.559,7.053 95.559,6.115 v1(95.568,6.105) ; v1(98.426,6.105) 98.426,6.368 98.559,6.501 R106_1.2@98.559,7.053 ; v1(101.283,6.105) 101.559,6.381 R107_1.2@101.559,7.053 ; v1(103.75,6.105) 104.057,6.105 C100_1.2@104.602,5.56 ; C100_1.2@104.702,5.56 v1(104.702,6.581) ; v1(134.463,48.257) 134.463,51.308 v1(135.277,52.122) 135.277,52.928 C1402_1.2@135.023,53.182
  Signals2 w0.254: v1(104.702,6.581) 104.702,13.566 129.15,38.013 132.483,38.013 134.706,40.236 134.706,48.015 v1(134.463,48.257)
  Bottom w0.254: v1(27.132,28.329) 27.132,24.461 29.931,21.662 45.375,21.662 47.902,19.135 74.111,19.135 74.441,18.805 74.441,16.523 74.699,16.265 74.906,16.265 87.24,16.265 89.145,16.265 90.702,14.707 90.702,13.534 92.178,12.058 100.081,12.058 104.702,7.437 v1(104.702,6.581) ; v1(80.646,6.105) v1(83.503,6.105) v1(86.361,6.105) v1(89.218,6.105) v1(92.393,6.105) v1(95.568,6.105) v1(98.426,6.105) v1(101.283,6.105) v1@103.908,6.105 ; v1(103.75,6.105) v1@103.907,6.105
+3.0V_VREF2_2: C100_2.2 C400.2 C406.2 C1402_2.2 IC1400_2.50 R100_2.2 R101_2.2 R102_2.2 R103_2.2 R104_2.2 R105_2.2 R106_2.2 R107_2.2 TP1402_2.1 X401.17 | length 212.6
  Top w0.152: C100_2.2@75.868,5.56 C100_2.2@75.968,5.56 ; v1(85.43,52.396) 88.775,52.396 89.526,53.146 89.526,54.587 TP1402_2.1@90.573,55.635
  Top w0.254: C400.2@0.403,43.908 2.43,43.908 3.946,45.424 ; X401.17@4.848,45.475 3.997,45.475 3.946,45.424 ; v1(26.438,24.52) C406.2@26.438,27.605 25.862,27.605 24.502,28.965 -1.025,28.965 -1.025,44.522 -0.123,45.424 3.946,45.424 ; R100_2.2@51.937,7.027 51.937,6.476 52.308,6.105 v1(52.315,6.105) ; R101_2.2@54.937,7.027 54.937,6.339 v1(55.172,6.105) ; R102_2.2@57.937,7.027 57.937,6.356 v1(58.188,6.105) ; R103_2.2@60.937,7.027 60.937,6.213 v1(61.046,6.105) ; R104_2.2@63.937,7.027 63.937,6.229 v1(64.062,6.105) ; R105_2.2@66.937,7.027 66.937,6.245 v1(67.078,6.105) ; R106_2.2@69.937,7.027 69.937,6.262 v1(70.095,6.105) ; R107_2.2@72.937,7.027 72.937,6.278 v1(73.111,6.105) ; v1(75.016,6.105) 75.323,6.105 C100_2.2@75.868,5.56 ; C100_2.2@75.968,5.56 v1(75.968,6.581) ; v1(80.731,48.967) 81.123,49.36 IC1400_2.50@81.123,50.54 81.123,51.569 81.63,52.075 v1(82.318,52.075) C1402_2.2@82.318,53.022
  Signals2 w0.254: v1(75.968,6.581) 75.968,17.049 76.488,17.569 76.488,18.602 76.296,18.795 76.296,36.594 82.318,42.617 82.318,47.38 v1(80.731,48.967)
  Bottom w0.152: v1(82.318,52.075) 83.127,52.884 84.942,52.884 v1(85.43,52.396)
  Bottom w0.254: v1(26.438,24.52) 29.762,21.196 45.15,21.196 47.7,18.646 70.095,18.646 75.968,12.772 v1(75.968,6.581) ; v1(52.315,6.105) v1(55.172,6.105) v1(58.188,6.105) v1(61.046,6.105) v1(64.062,6.105) v1(67.078,6.105) v1(70.095,6.105) v1(73.111,6.105) v1(75.016,6.105)